# Altium PCB Ad Hoc Radio Node 2005 v3.PCBDOC
Units mm, origin at the board's own origin, x right, y up, seen from the top; angles counter-clockwise.
Board outline 127 x 101.6 mm, 4 copper layers (Top Layer, Internal Plane 1, Internal Plane 2, Bottom Layer); 60 components, 66 nets, 240 pads, 29 vias.
Unrouted connection lines stored in the file: 1.
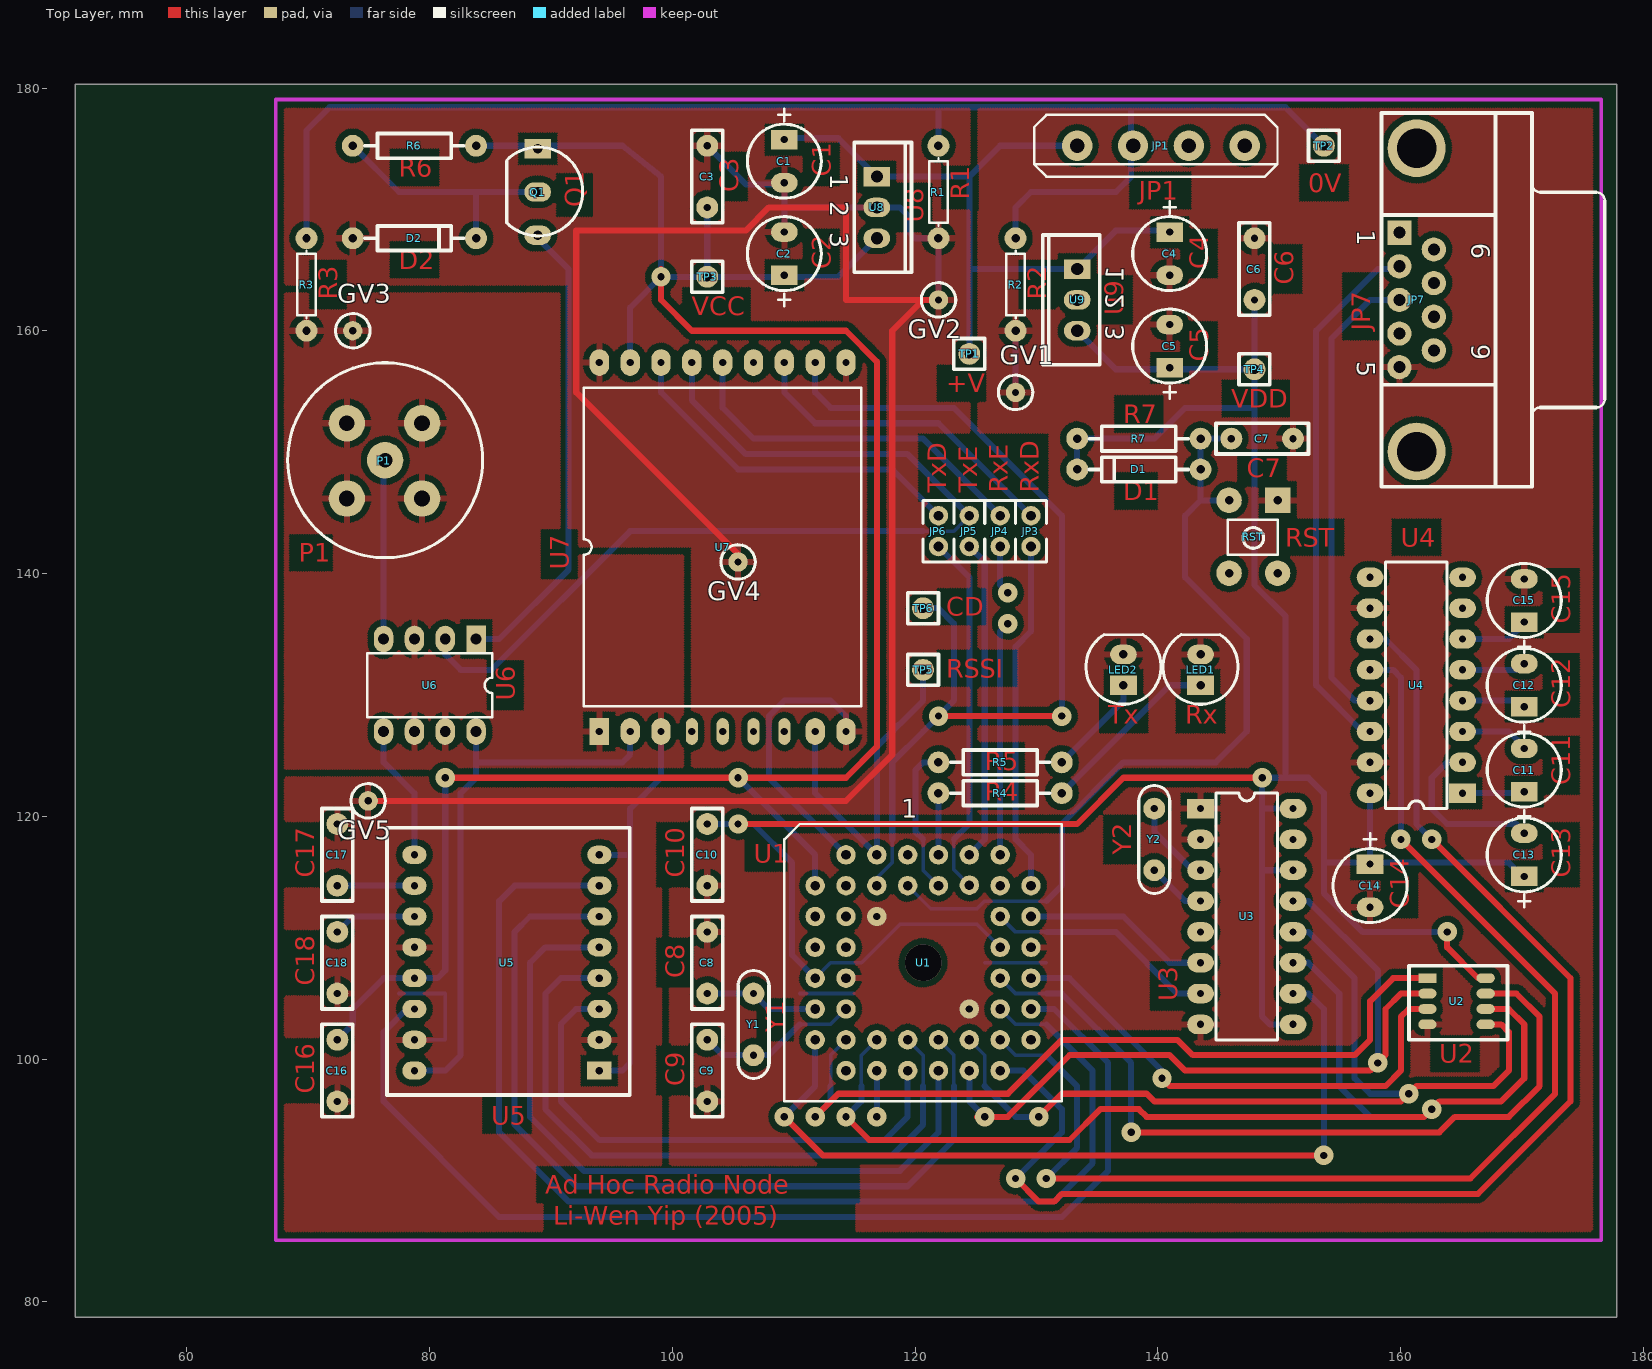
[diagram p0: Top Layer view]
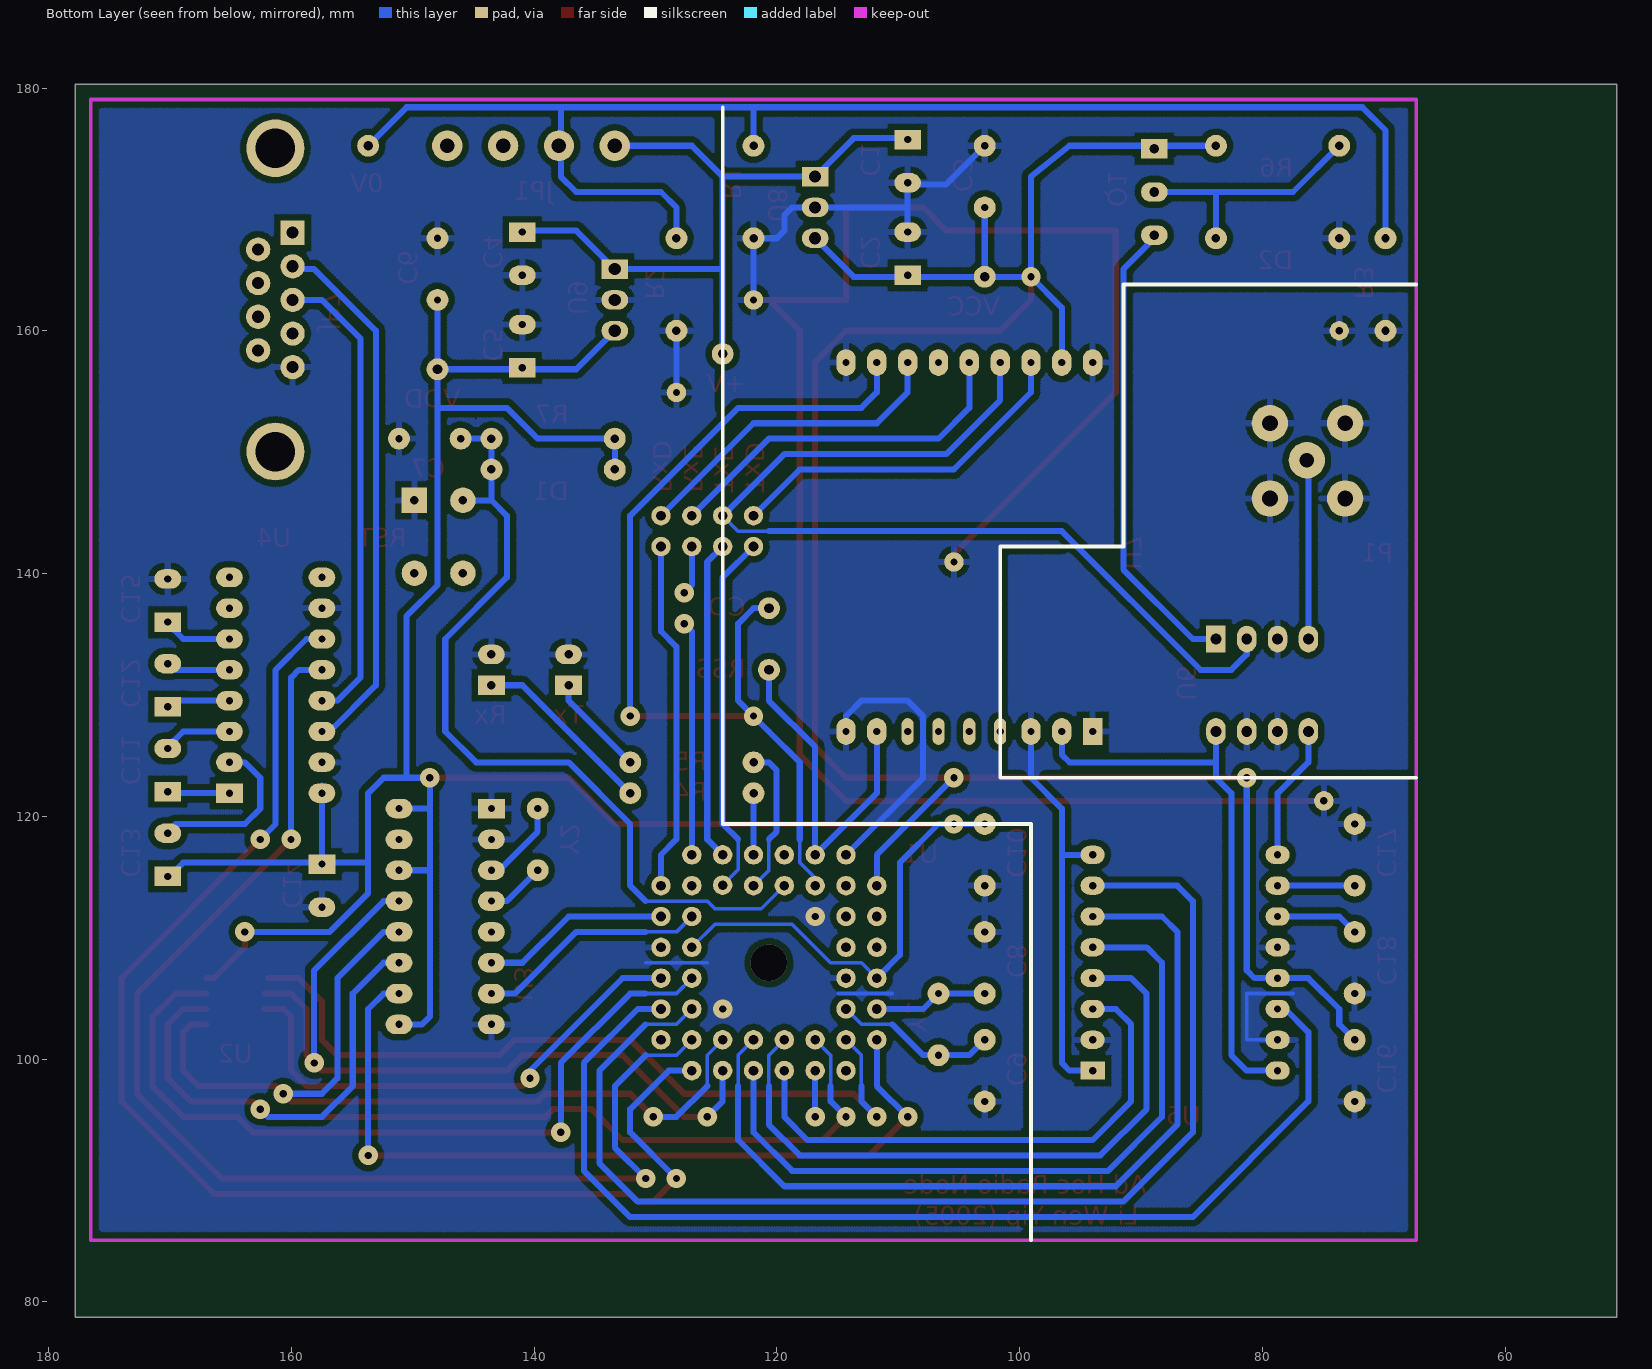
[diagram p1: Bottom Layer view, seen from below]
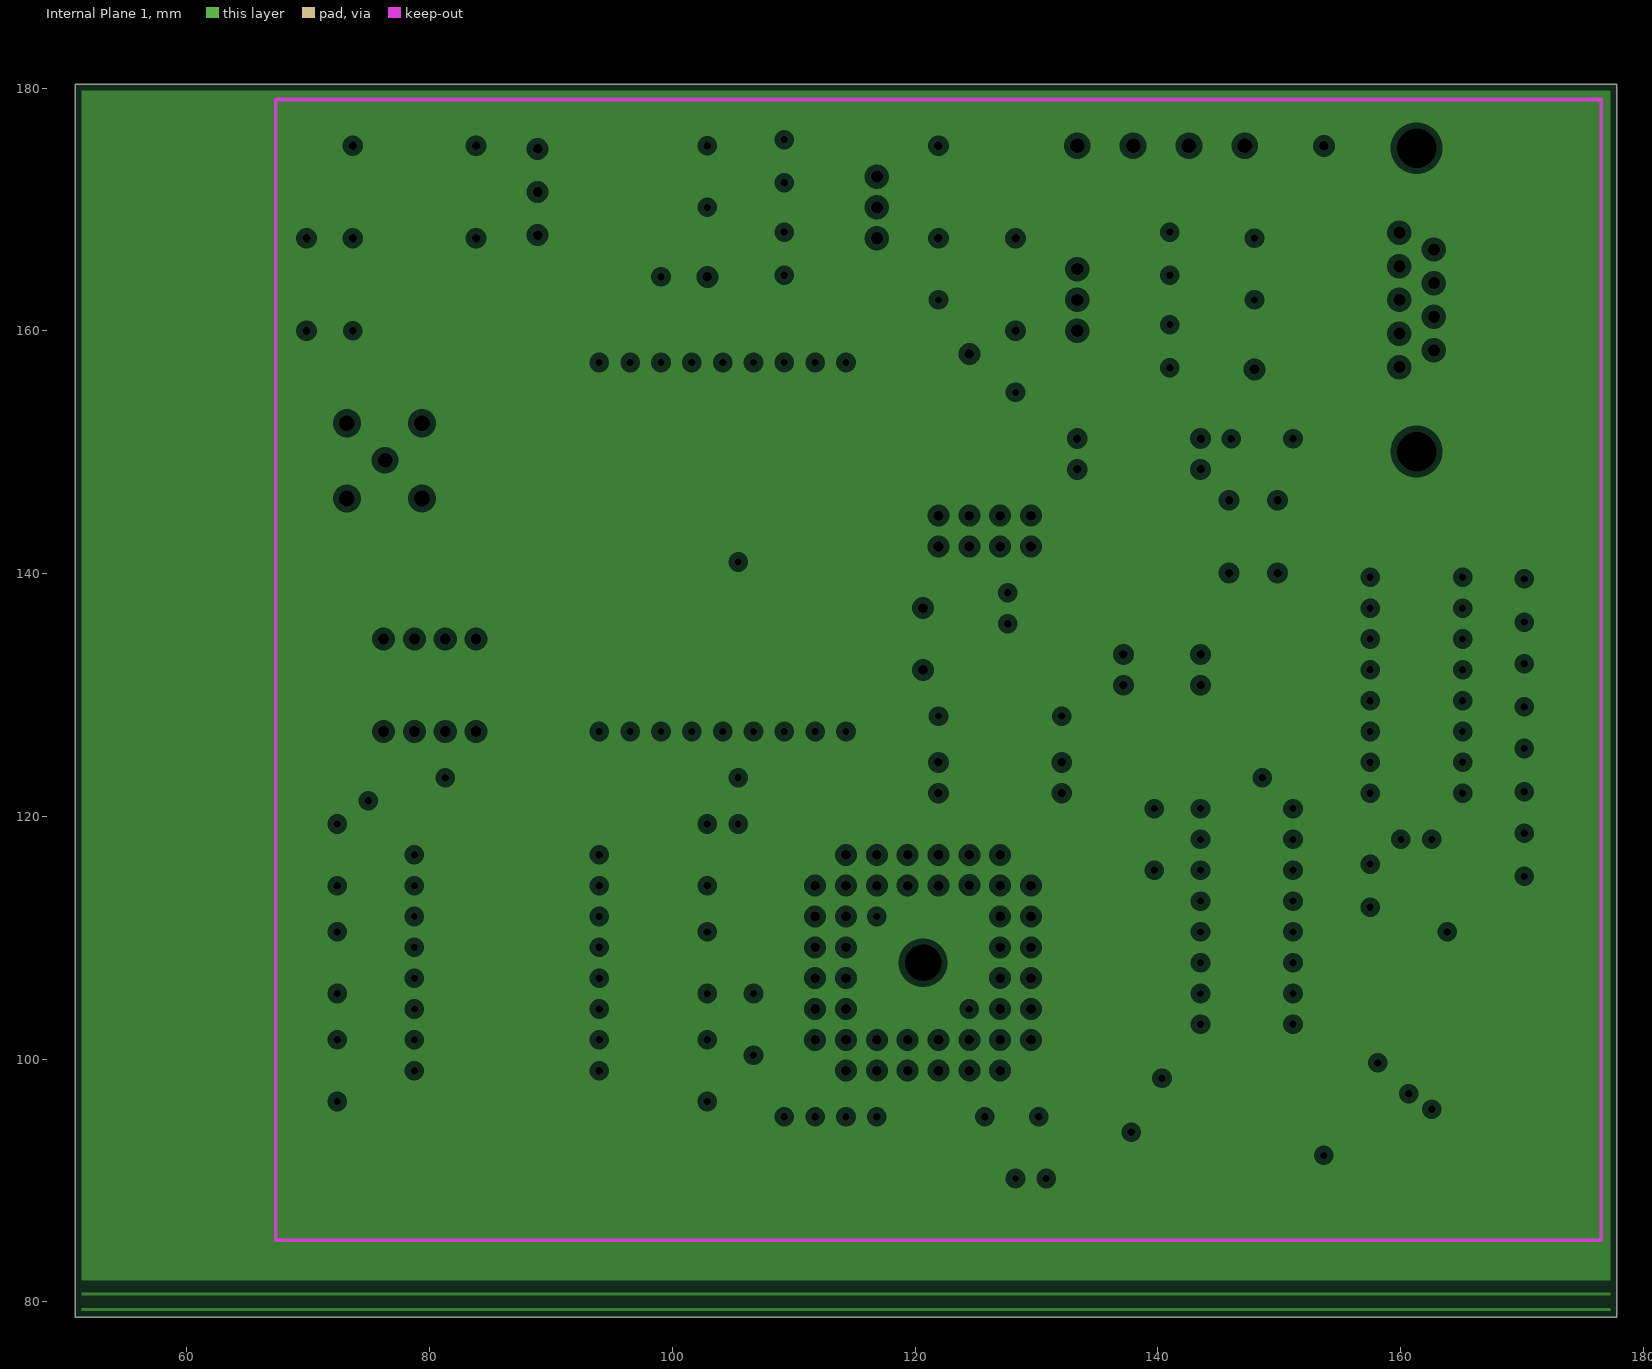
[diagram p2: Internal Plane 1, clearances drawn from the general rule]
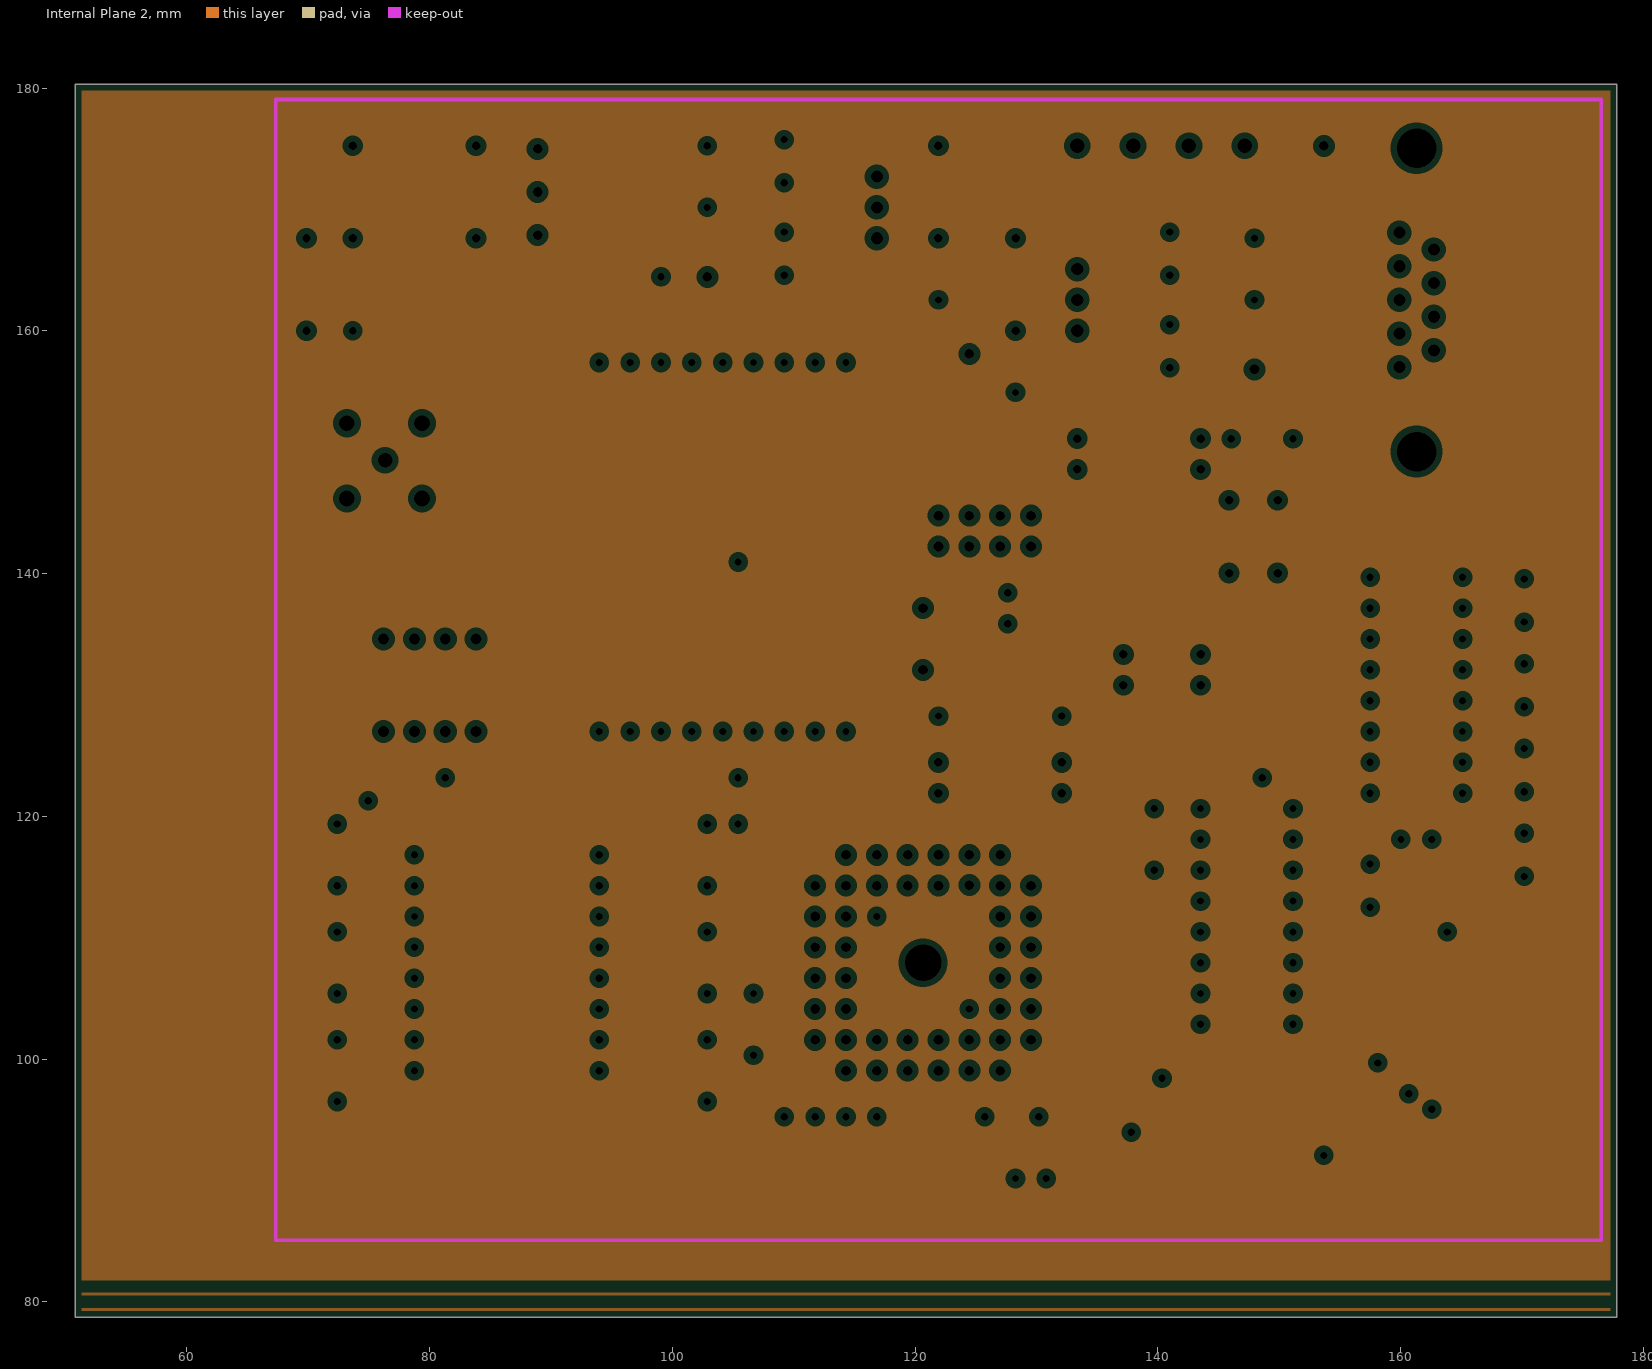
[diagram p3: Internal Plane 2, clearances drawn from the general rule]

## Layer stack, top to bottom
Top Layer: signal copper 0.0356
Dielectric: dielectric 0.32, FR-4, Dk 4.8
Internal Plane 1: plane copper 0.0356
Dielectric: dielectric 0.32, FR-4, Dk 4.8
Internal Plane 2: plane copper 0.0356
Dielectric: dielectric 0.32, FR-4, Dk 4.8
Bottom Layer: signal copper 0.0356

## Board outline
50.8,78.74 177.8,78.74 177.8,180.34 50.8,180.34

## Design rules (kind name [scope] priority, off if disabled: settings)
Clearance [All] p1: gap=0.5
ComponentClearance [All] p1: gap=0.254 collisioncheckmode=0
HoleSize [All] p1: absolutevalues=TRUE maxlimit=5 minlimit=0.6 maxpercent=80.000 minpercent=20.000
PlaneClearance [All] p1: clearance=0.508
PlaneConnect [All] p1: planeconnectstyle=Relief reliefexpansion=0.508 reliefentries=4 reliefconductorwidth=0.254 reliefairgap=0.254
PolygonConnect [All] p1: connectstyle=Relief reliefconductorwidth=0.5 reliefentries=4 polygonreliefangle="90 Angle"
RoomDefinition "Ad Hoc Radio Node 2005 v3" [InComponentClass('Ad Hoc Radio Node 2005 v3')] p1: confinementstyle=ConfineIn formatcopy=TRUE outline 0,0 50.8,0 50.8,25.4 0,25.4
RoutingLayers [All] p1: top layer=Horizontal bottom layer=Vertical
RoutingVias [All] p1: holewidth=0.6 width=1.6 viastyle="Through Hole" minholewidth=0.6 minwidth=1.6 maxholewidth=0.6 maxwidth=1.6
SolderMaskExpansion [All] p1: expansion=0.102
TestPointUsage [All] p1: valid=0 allowmultiple=FALSE
Testpoint [All] p1: side=15 testpointundercomponent=TRUE minsize=1.016 maxsize=2.54 preferedsize=1.524 minholesize=0 maxholesize=1.016 preferedholesize=0.813 testpointgrid=0.025 style=1023 order=-539222988
Width [All] p1: maxlimit=1.27 minlimit=0.3 preferedwidth=0.305 toplayer_prefwidth=0.5 bottomlayer_prefwidth=0.5 minimp=50.000000 maximp=50.000000 favimp=50.000000
13 further rules are at their usual default settings.

## Components (designator, comment, footprint, x,y, rotation, side; value= is the part's Value field where it differs from the comment)
C1 "Cap" "0.1 ELECTRO CAP" 109.22,175.26 r270 top
C2 "Cap" "0.1 ELECTRO CAP" 109.22,165.1 r90 top
C3 "Cap" "0.2 BOX CAP"#1 105.41,175.26 r90 top
C4 "Cap" "0.1 ELECTRO CAP" 140.97,167.64 r270 top
C5 "Cap" "0.1 ELECTRO CAP" 140.97,157.48 r90 top
C6 "Cap" "0.2 BOX CAP"#2 145.415,167.64 r90 top
C7 "0.1uF" "0.2 BOX CAP"#1 151.13,148.59 r0 top
C8 "Cap" "0.2 BOX CAP"#1 100.33,105.41 r270 top
C9 "Cap" "0.2 BOX CAP"#1 105.41,101.6 r90 top
C10 "" "0.2 BOX CAP"#1 100.33,114.3 r270 top
C11 "Cap2" "0.1 ELECTRO CAP" 170.18,122.555 r90 top
C12 "Cap2" "0.1 ELECTRO CAP" 170.18,129.54 r90 top
C13 "Cap2" "0.1 ELECTRO CAP" 170.18,115.57 r90 top
C14 "Cap2" "0.1 ELECTRO CAP" 157.48,115.57 r270 top
C15 "Cap2" "0.1 ELECTRO CAP" 170.18,136.525 r90 top
C16 "" "0.2 BOX CAP"#1 74.93,101.6 r90 top
C17 "" "0.2 BOX CAP"#1 74.93,119.38 r90 top
C18 "" "0.2 BOX CAP"#1 69.85,105.41 r270 top
D1 "1N914" diode-0.4/1.8 140.97,148.59 r180 top (schematic designator D2)
D2 "D Zener" diode-0.4/1.8 76.2,167.64 r0 top
GV1 "GV" GROUNDVIA 128.27,154.94 r0 top
GV2 "GV" GROUNDVIA 121.92,162.56 r0 top
GV3 "GV" GROUNDVIA 73.66,160.02 r0 top
GV4 "GV" GROUNDVIA 105.41,140.97 r0 top (schematic designator GV2)
GV5 "GV" GROUNDVIA 74.93,121.285 r0 top (schematic designator GV2)
JP1 "Header 4" "4 WAY TERMINAL BLOCK" 133.35,175.26 r0 top
JP3 "RxD" JUMPER 129.54,144.78 r270 top (schematic designator JP5)
JP4 "RxE" JUMPER 127,144.78 r270 top (schematic designator JP6)
JP5 "TxE" JUMPER 124.46,144.78 r270 top (schematic designator JP3)
JP6 "TxD" JUMPER 121.92,144.78 r270 top (schematic designator JP4)
JP7 "D Connector 9" DSUB1.385-2H9 170.815,162.56 r270 top
LED1 "Rx" "STD LED" 143.51,130.81 r90 top
LED2 "Tx" "STD LED" 137.16,130.81 r90 top
P1 "PCB BNC CONNECTOR" "PCB BNC Connector" 79.375,152.4 r270 top (schematic designator P2)
Q1 "BC548" BJT 88.9,173.99 r270 top
R1 "" AXIAL-0.3 121.92,171.45 r270 top
R2 "" AXIAL-0.3 128.27,163.83 r270 top
R3 "" AXIAL-0.3 69.85,163.83 r270 top
R4 "" AXIAL-0.4/1.8 124.46,121.92 r0 top
R5 "" AXIAL-0.4/1.8 124.46,124.46 r0 top
R6 "" AXIAL-0.4/1.8 81.28,175.26 r180 top
R7 "Res1" AXIAL-0.4/1.8 140.97,151.13 r180 top
RST "SW-PB" "RESET SWITCH - DUPLICATE" 149.86,146.05 r270 top (schematic designator S1)
TP1 "+V" TESTPOINT 121.92,158.115 r0 top
TP2 "0V" TESTPOINT 151.13,175.26 r0 top
TP3 "VCC" TESTPOINT 102.87,167.005 r270 top
TP4 "VDD" TESTPOINT 147.955,159.385 r270 top
TP5 "RSSI" TESTPOINT 118.11,132.08 r0 top
TP6 "CD" TESTPOINT 118.11,137.16 r0 top
U1 "PIC18C452_PLCC" "PIC18C452_PLCC - DUPLICATE" 111.76,116.84 r0 top
U2 "FRAM" "Ramtron FRAM" 162.205,106.68 r0 top
U3 "DS1306" DIP-16 143.51,120.65 r0 top
U4 "MAX232EPE" DIP-16 165.1,121.92 r180 top
U5 "" DIP16-ADAPTOR 93.98,99.06 r180 top
U6 "ADG918" DIP-8 80.01,130.81 r180 top
U7 "X2010 NBFM Transceiver" X2010 93.98,127 r90 top
U8 "LM340T5.0" SFM-T3/A4.7V 116.84,170.18 r270 top
U9 "LM340T5.0" SFM-T3/A4.7V 133.35,162.56 r270 top
Y1 "XTAL" XTAL 106.68,105.41 r270 top
Y2 "XTAL" XTAL 139.7,120.65 r270 top

## Footprints (in the part's own frame and the unit in brackets; to place one, negate y for a bottom-side part, rotate by r counter-clockwise, add the part's x,y. Pads: shape width x height; smd on the part's side, far side on the other; paste and mask are expansions set on the pad)
"0.1 ELECTRO CAP" [mm] "Electrolytic Cap"
  rect 1.6x2.2 hole 0.6: 1(-0.508,0)
  oval 1.6x2.2 hole 0.6: 2(3.048,0)
  silkscreen extent -3.05,-3.04 4.32,3.05
"0.2 BOX CAP"#1 [mm]
  round 1.8 hole 0.6: 1(-5.08,2.54) 2(0,2.54)
  silkscreen extent -6.35,1.27 1.27,3.81
"0.2 BOX CAP"#2 [mm]
  round 1.8 hole 0.6: 1(-5.08,-2.54) 2(0,-2.54)
  silkscreen extent -6.35,-3.81 1.27,-1.27
"4 WAY TERMINAL BLOCK" [mm]
  round 2.5 hole 1.2: 1(0,0) 2(4.6,0) 3(9.2,0) 4(13.8,0)
  silkscreen extent -3.56,-2.54 16.5,2.54
AXIAL-0.3 [mm]
  round 1.8 hole 0.7: 1(-3.81,0) 2(3.81,0)
  silkscreen extent -2.77,-0.76 2.77,0.76
AXIAL-0.4/1.8 [mm]
  round 1.8 hole 0.7: 1(-2.54,0) 2(7.62,0)
  silkscreen extent -1.52,-1.02 6.6,1.02
BJT [mm]
  rect 1.6x2.2 hole 0.8: 1(-1.016,0)
  oval 1.6x2.2 hole 0.8: 2(2.54,0) 3(6.096,0)
  silkscreen extent -1.16,-2.54 6.15,3.71
diode-0.4/1.8 [mm]
  round 1.8 hole 0.7: 1(-2.54,0) 2(7.62,0)
  silkscreen extent -1.52,-1.02 6.6,1.02
DIP16-ADAPTOR [mm]
  rect 2x1.5 hole 0.6: 1(0,0)
  oval 2x1.5 hole 0.6: 2(0,-2.54) 3(0,-5.08) 4(0,-7.62) 5(0,-10.16) 6(0,-12.7) 7(0,-15.24) 8(0,-17.78) 9(15.24,-17.78) 10(15.24,-15.24) 11(15.24,-12.7) 12(15.24,-10.16) 13(15.24,-7.62) 14(15.24,-5.08) 15(15.24,-2.54) 16(15.24,0)
  silkscreen extent -2.5,-20 17.5,2
DIP-8 [mm]
  rect 1.6x2.2 hole 0.9: 1(-3.81,-3.81)
  oval 1.6x2.2 hole 0.9: 2(-1.27,-3.81) 3(1.27,-3.81) 4(3.81,-3.81) 5(3.81,3.81) 6(1.27,3.81) 7(-1.27,3.81) 8(-3.81,3.81)
  silkscreen extent -5.15,-2.65 5.15,2.65
DIP-16 [mm]
  rect 2.2x1.6 hole 0.6: 1(0,0)
  oval 2.2x1.6 hole 0.6: 2(0,-2.54) 3(0,-5.08) 4(0,-7.62) 5(0,-10.16) 6(0,-12.7) 7(0,-15.24) 8(0,-17.78) 9(7.62,-17.78) 10(7.62,-15.24) 11(7.62,-12.7) 12(7.62,-10.16) 13(7.62,-7.62) 14(7.62,-5.08) 15(7.62,-2.54) 16(7.62,0)
  silkscreen extent 1.27,-19.05 6.35,1.27
DSUB1.385-2H9 [mm]
  rect 2x2 hole 1: 1(-5.54,-10.92)
  round 2 hole 1: 2(-2.77,-10.92) 3(0,-10.92) 4(2.77,-10.92) 5(5.54,-10.92) 6(-4.155,-8.08) 7(-1.385,-8.08) 8(1.385,-8.08) 9(4.155,-8.08)
  round 4.76 hole 3.26: 10(-12.495,-9.5) 11(12.495,-9.5)
  silkscreen extent -15.4,-12.4 15.4,6
GROUNDVIA [mm]
  round 1.6 hole 0.6: 1(0,0)
  silkscreen extent -1.42,-1.42 1.42,1.42
JUMPER [mm]
  round 1.6 hole 0.8: 1(0,0) 2(2.54,0)
  silkscreen extent -1.27,-1.27 3.81,1.27
"PCB BNC Connector" [mm]
  round 3 hole 1.2: 1(3.048,-3.048)
  round 3 hole 1.3: 2(0,0) 2(0,-6.2) 2(6.2,0) 2(6.2,-6.2)
  silkscreen extent -4.98,-11.08 11.08,4.98
"PIC18C452_PLCC - DUPLICATE" [mm]
  round 1.6 hole 0.8: 1(7.62,0) 2(7.62,-2.54) 3(5.08,0) 4(5.08,-2.54) 5(2.54,0) 6(0,-2.54) 7(2.54,-2.54) 8(0,-5.08) 9(2.54,-5.08) 10(0,-7.62) 11(2.54,-7.62) 12(0,-10.16) 13(2.54,-10.16) 14(0,-12.7) 15(2.54,-12.7) 16(0,-15.24) 17(2.54,-17.78) 18(2.54,-15.24) 19(5.08,-17.78) 20(5.08,-15.24) 21(7.62,-17.78) 22(7.62,-15.24) 23(10.16,-17.78) 24(10.16,-15.24) 25(12.7,-17.78) 26(12.7,-15.24) 27(15.24,-17.78) 28(17.78,-15.24) 29(15.24,-15.24) 30(17.78,-12.7) 31(15.24,-12.7) 32(17.78,-10.16) 33(15.24,-10.16) 34(17.78,-7.62) 35(15.24,-7.62) 36(17.78,-5.08) 37(15.24,-5.08) 38(17.78,-2.54) 39(15.24,0) 40(15.24,-2.54) 41(12.7,0) 42(12.7,-2.5) 43(10.16,0) 44(10.16,-2.54)
  silkscreen extent -2.54,-20.32 20.32,2.54
"Ramtron FRAM" [mm]
  rect 1.5x0.8 smd: 1(0,0)
  oval 1.5x0.8 smd: 2(0,-1.27) 3(0,-2.54) 4(0,-3.81) 5(4.8,-3.81) 6(4.8,-2.54) 7(4.8,-1.27) 8(4.8,0)
  silkscreen extent -1.52,-5.08 6.6,1.02
"RESET SWITCH - DUPLICATE" [mm]
  rect 2.1x2.1 hole 0.7: 1(0,0)
  round 2.1 hole 0.7: 2(0,-4) ""(6,0) ""(6,-4)
  silkscreen extent 1.6,-4.1 4.5,0
SFM-T3/A4.7V [mm]
  rect 1.6x2.2 hole 1: 1(-2.54,0)
  oval 1.6x2.2 hole 1: 2(0,0) 3(2.54,0)
  silkscreen extent -5.35,-1.85 5.35,2.85
"STD LED" [mm]
  rect 1.6x2.2 hole 0.7: 1(0,0)
  oval 1.6x2.2 hole 0.7: 2(2.54,0)
  silkscreen extent -1.56,-3.09 4.17,3.09
TESTPOINT [mm] "Test Point"
  round 1.8 hole 0.8: 1(2.54,0)
  silkscreen extent 1.27,-1.27 3.81,1.27
X2010 [mm]
  rect 2.2x1.6 hole 0.6: 1(0,0)
  oval 2.2x1.6 hole 0.6: 2(0,-2.54) 3(0,-5.08) 8(0,-17.78) 9(0,-20.32) 10(30.4,-20.32) 11(30.4,-17.78) 12(30.4,-15.24) 13(30.4,-12.7) 14(30.4,-10.16) 15(30.4,-7.62) 16(30.4,-5.08) 17(30.4,-2.54) 18(30.4,0)
  oval 2.2x1 hole 0.6: 4(0,-7.62) 5(0,-10.16) 6(0,-12.7) 7(0,-15.24)
  silkscreen extent 2.08,-21.59 28.32,1.27
XTAL [mm] "Crystal"
  round 1.8 hole 0.6: 1(0,0) 2(5.08,0)
  silkscreen extent -1.9,-1.27 6.98,1.27

## Part data
C1 C2 C3 C4 C5 C6 C8 C9 C11 C12 C13 C15: "Capacitor"
C7: library part CAP, "Capacitor"
C10 C16 C17 C18: library part Cap, "Capacitor"
C14: library part "Cap Pol1", "Polarized Capacitor (Radial)"
D1: library part Diode, "Default Diode"
D2: "Zener Diode"
JP1: "Header, 4-Pin"
JP3 JP4 JP5 JP6: library part JUMPER
JP7: "Receptacle Assembly, 9 Position, Right Angle"
LED1 LED2: library part LED2, "Typical RED, GREEN, YELLOW, AMBER GaAs LED"
P1: library part BNC, "BNC Elbow Connector"
Q1: library part NPN, "NPN Bipolar Transistor"
R1 R2 R3 R4 R5 R6: library part Res1, "Resistor"
R7: "Resistor"
RST: "Switch"
TP1 TP2 TP3 TP4 TP5 TP6: library part TESTPOINT, "Test Point"
U4: "+5V Powered RS-232 Driver/Receiver"
U5: library part AD8369_DIGITAL_CONT_PWR_AMP
U6: library part "T7 NBFM TRANSMITTER"
U7: library part "R7 NBFM RECEIVER"
U8 U9: "Series 3-Terminal Positive Regulator"
Y1 Y2: "Crystal Oscillator"

## Via types
v1: diameter 1.6, hole 0.6, Top Layer to Bottom Layer, 28 vias
v2: diameter 3, hole 3, Top Layer to Bottom Layer, 1 vias

## Nets (pads, with @x,y where several pads share a name; then routed paths per layer and width w, separated by ;. In a path a pad name is that pad's centre, name@x,y a point inside that pad or via, vN(x,y) a via of type N, cw(c..) or ccw(c..) an arc to the next point about the centre after c; other vN are vias at no path point)
0V: JP1.2 R1.1 R2.1 R3.1 TP2.1 | length 116.8
  Bottom Layer w0.5: R3.1 69.85,176.53 71.755,178.435 150.495,178.435 TP2.1 ; R1.1 121.92,178.435 ; R2.1 128.27,170.18 129.54,171.45 136.525,171.45 137.795,172.72 137.795,178.435
2.6V: Q1.3 U6.1 | length 38.3
  Bottom Layer w0.5: U6.1 85.725,134.62 91.44,140.335 91.44,165.1 Q1.3@88.9,167.64
3.3V: D2.2 Q1.2 R6.2 | length 20.6
  Bottom Layer w0.5: R6.2 77.47,171.45 Q1.2 ; D2.2 83.82,171.45
ANTENNA: P1.1 U6.4 | length 14.6
  Bottom Layer w0.5: U6.4 P1.1@76.2,149.225
B0: U1.21 U5.3 | length 44.5
  Bottom Layer w0.5: U5.3 92.075,104.14 90.805,102.87 90.805,96.52 93.98,93.345 117.475,93.345 119.38,95.25 U1.21
B1: U1.22 U5.4 | length 55.8
  Bottom Layer w0.3: U1.22 120.65,100.33 120.65,97.79
  Bottom Layer w0.5: U5.4 90.805,106.68 89.535,105.41 89.535,95.885 93.345,92.075 118.11,92.075 120.65,94.615 120.65,97.79
B2: U1.23 U5.5 | length 60.8
  Bottom Layer w0.5: U5.5 89.535,109.22 88.265,107.95 88.265,95.25 92.71,90.805 118.745,90.805 121.92,93.98 U1.23
B3: U1.24 U5.6 | length 72
  Bottom Layer w0.3: U1.24 123.19,100.33 123.19,97.79
  Bottom Layer w0.5: U5.6 88.265,111.76 86.995,110.49 86.995,94.615 92.075,89.535 119.38,89.535 123.19,93.345 123.19,97.79
C1+: C11.1 U4.1 | length 5.1
  Bottom Layer w0.5: U4.1 C11.1@170.18,121.92
C1-: C11.2 U4.3 | length 5.6
  Bottom Layer w0.5: U4.3 168.91,127 C11.2@170.18,125.73
C2+: C12.1 U4.4 | length 5.3
  Bottom Layer w0.5: U4.4 169.545,129.54 C12.1@170.18,128.905
C2-: C12.2 U4.5 | length 5.3
  Bottom Layer w0.5: U4.5 169.545,132.08 C12.2@170.18,132.715
CD: TP6.1 U1.4 U7.11 | length 80.9
  Top Layer w0.5: v1(121.92,128.27) v1(132.08,128.27)
  Bottom Layer w0.3: U1.4 116.84,114.935 118.11,116.205 118.11,118.11
  Bottom Layer w0.5: U7.11 111.76,154.94 113.03,153.67 123.19,153.67 132.08,144.78 v1(132.08,128.27) ; 118.11,118.11 118.11,124.46 120.65,127 v1(121.92,128.27) 123.19,129.54 123.19,135.89 121.92,137.16 TP6.1
DENB: U1.31 U5.7 | length 98.4
  Bottom Layer w0.3: U1.31 128.27,102.87 130.81,102.87
  Bottom Layer w0.5: U5.7@94.615,114.3 86.995,114.3 85.725,113.03 85.725,93.98 91.44,88.265 131.445,88.265 134.62,91.44 134.62,99.06 130.81,102.87
FRAM_CS: U1.18 U2.1 | length 65.2
  Top Layer w0.5: v1(111.76,95.25) 113.665,97.155 127.635,97.155 132.08,101.6 141.605,101.6 142.875,100.33 156.21,100.33 157.48,101.6 157.48,104.775 159.385,106.68 U2.1@161.925,106.68
  Bottom Layer w0.3: 113.03,97.79 113.03,100.33 U1.18
  Bottom Layer w0.5: v1(111.76,95.25) 113.03,96.52 113.03,97.79
GND: C4.2 C5.2 C6.2 C7.2 C8.1 C9.1 C10.2 C14.2 C15.2 GV1.1 JP7.5 LED1.2 LED2.2 R2.2 RST.1 U1.13 U1.34 U2.4 U3.1 U3.2 U3.8 U4.10 U4.15 U9.2 | length 14.6
  Bottom Layer w0.3: 110.49,105.41 114.935,105.41 ; 125.73,107.95 130.81,107.95
  Bottom Layer w0.5: GV1.1 R2.2
  other v1: 124.46,104.14 116.84,111.76
HOLD: U1.33 U2.7 | length 65.6
  Top Layer w0.5: v1(137.795,93.98) 163.195,93.98 164.465,95.25 168.91,95.25 171.45,97.79 171.45,103.505 169.545,105.41 U2.7
  Bottom Layer w0.3: U1.33 128.27,105.41 130.81,105.41
  Bottom Layer w0.5: 130.81,105.41 132.08,105.41 137.795,99.695 v1(137.795,93.98)
INT1: U1.37 U3.7 | length 19.1
  Bottom Layer w0.3: U1.37 128.27,110.49 130.81,110.49
  Bottom Layer w0.5: 130.81,110.49 136.525,110.49 141.605,105.41 U3.7
INTO: U1.36 U3.6 | length 15.5
  Bottom Layer w0.5: U1.36 137.16,111.76 140.97,107.95 U3.6
MCLR: C7.1 D1.1 R7.1 RST.2 U1.2 | length 70.2
  Bottom Layer w0.3: U1.2 121.285,112.395 125.095,112.395 125.73,113.03 130.81,113.03
  Bottom Layer w0.5: 130.81,113.03 132.08,114.3 132.08,119.38 137.16,124.46 144.78,124.46 147.32,127 147.32,134.62 142.24,139.7 142.24,144.78 143.51,146.05 ; C7.1 R7.1 143.51,146.05 ; RST.2@146.685,146.05 143.51,146.05
MISO: U1.25 U2.2 U3.13 | length 65.9
  Top Layer w0.5: v1@125.095,95.25 v1(125.73,95.25) 127.635,95.25 132.715,100.33 140.97,100.33 142.24,99.06 157.48,99.06 v1(158.115,99.695) 158.75,100.33 158.75,104.14 160.02,105.41 U2.2
  Bottom Layer w0.5: U1.25 124.46,96.52 v1(125.73,95.25) ; U3.13 152.4,113.03 158.115,107.315 v1(158.115,99.695)
MOSI: U1.26 U2.5 U3.12 | length 75.9
  Top Layer w0.5: v1(130.175,95.25) 132.08,97.155 139.065,97.155 139.7,96.52 160.02,96.52 v1(160.655,97.155) 161.29,97.79 163.195,97.79 167.64,97.79 168.91,99.06 168.91,102.235 168.275,102.87 U2.5
  Bottom Layer w0.3: U1.26 125.73,100.33 125.73,97.79
  Bottom Layer w0.5: 125.73,97.79 128.27,95.25 v1(130.175,95.25) ; U3.12 152.4,110.49 156.21,106.68 156.21,98.425 157.48,97.155 v1(160.655,97.155)
NetC13_2: C13.2 U4.2 | length 14
  Bottom Layer w0.5: U4.2 163.83,124.46 162.56,123.19 162.56,120.65 163.83,119.38 169.545,119.38 C13.2@170.18,118.745
NetC15_1: C15.1 U4.6 | length 5.6
  Bottom Layer w0.5: U4.6 168.91,134.62 C15.1@170.18,135.89
NetC17_1: C17.1 U5.10 | length 6.3
  Bottom Layer w0.5: C17.1 U5.10
NetC18_1: C18.1 U5.11 | length 6.9
  Bottom Layer w0.5: C18.1 73.66,111.76 U5.11
NetLED1_1: LED1.1 R4.2 | length 15.1
  Bottom Layer w0.5: R4.2 140.97,130.81 LED1.1
NetLED2_1: LED2.1 R5.2 | length 8.5
  Bottom Layer w0.5: R5.2 137.16,129.54 LED2.1
NetU3_3: U3.3 Y2.1 | length 7
  Bottom Layer w0.5: Y2.1 139.7,118.745 142.875,115.57 U3.3
NetU3_4: U3.4 Y2.2 | length 4.9
  Bottom Layer w0.5: Y2.2 142.24,113.03 U3.4
NetU7_4: U7.4
OSC1: C8.2 U1.14 Y1.1 | length 9.4
  Bottom Layer w0.5: C8.2 104.14,105.41 Y1.1 107.95,104.14 U1.14
OSC2: C9.2 U1.15 Y1.2 | length 13.5
  Bottom Layer w0.3: 110.49,102.87 113.03,102.87 U1.15
  Bottom Layer w0.5: C9.2 104.14,100.33 Y1.2 107.95,100.33 110.49,102.87
PWUP: U1.30 U5.14 | length 91.3
  Bottom Layer w0.5: U5.14 78.105,104.14 76.2,102.235 76.2,96.52 85.725,86.995 132.08,86.995 135.89,90.805 135.89,99.695 131.445,104.14 U1.30
R1IN: JP7.3 U4.13 | length 38.9
  Bottom Layer w0.5: U4.13 156.21,129.54 154.305,131.445 154.305,159.385 157.48,162.56 JP7.3@160.02,162.56
R1OUT: U1.29 U4.12 | length 103.8
  Top Layer w0.5: v1(130.81,90.17) 165.735,90.17 172.72,97.155 172.72,105.41 v1(160.02,118.11)
  Bottom Layer w0.3: U1.29 128.27,100.33 130.81,100.33
  Bottom Layer w0.5: v1(130.81,90.17) 133.35,92.71 133.35,97.79 130.81,100.33 ; U4.12 159.385,132.08 160.02,131.445 v1(160.02,118.11)
RFGND: GV3.1 P1.2 R3.2 U5.1 U5.8 U6.3 U6.6 U6.7 U7.1 U7.3 | length 33.7
  Bottom Layer w0.5: U5.1 95.885,99.06 96.52,99.695 96.52,120.65 99.06,123.19 U7.3 ; U5.8 96.52,116.84
RSSI: TP5.1 U1.3 U7.8 | length 29.1
  Bottom Layer w0.5: U7.8 111.76,121.92 U1.3 116.84,125.73 120.65,129.54 TP5.1
RTC_CS: U1.16 U3.10 | length 68.3
  Top Layer w0.5: v1(109.22,95.25) 112.395,92.075 v1(153.67,92.075)
  Bottom Layer w0.5: v1(109.22,95.25) 111.76,97.79 U1.16 ; U3.10 152.4,105.41 153.67,104.14 153.67,101.6 v1(153.67,92.075)
RXD: JP3.1 U7.12 | length 27
  Bottom Layer w0.5: U7.12 109.22,154.94 111.76,152.4 121.92,152.4 JP3.1
RXD_2: JP3.2 U1.38 | length 29
  Bottom Layer w0.5: U1.38 129.54,116.84 128.27,118.11 128.27,133.985 129.54,135.255 JP3.2
RXEN: JP6.1 U7.16 | length 29.5
  Bottom Layer w0.5: U7.16 99.06,156.845 99.06,154.94 105.41,148.59 118.11,148.59 JP6.1
RXEN_2: JP6.2 U1.42 | length 30
  Bottom Layer w0.3: 123.19,118.11 123.19,115.61 U1.42
  Bottom Layer w0.5: JP6.2 124.46,139.7 124.46,119.38 123.19,118.11
RXLED: R4.1 U1.43 | length 5.1
  Bottom Layer w0.5: U1.43 R4.1
SCLK: U1.20 U2.6 U3.11 | length 96.3
  Top Layer w0.5: v1(114.3,95.25) 116.205,93.345 132.715,93.345 135.255,95.885 138.43,95.885 139.065,95.25 161.925,95.25 v1(162.56,95.885) 163.195,96.52 168.275,96.52 170.18,98.425 170.18,102.87 168.91,104.14 U2.6
  Bottom Layer w0.3: 115.57,97.79 115.57,100.33 U1.20
  Bottom Layer w0.5: v1(114.3,95.25) 115.57,96.52 115.57,97.79 ; U3.11 152.4,107.95 154.94,105.41 154.94,97.79 157.48,95.25 161.925,95.25 v1(162.56,95.885)
SGND: C1.2 C2.2 C3.2 C16.1 C17.2 C18.2 D2.1 GV2.1 GV4.1 GV5.1 R1.2 U1.5 U5.2 U5.12 U5.15 U7.9 U7.10 U7.18 U8.2 | length 218.3
  Top Layer w0.5: GV5.1 114.3,121.285 118.11,125.095 118.11,160.02 120.65,162.56 ; GV4.1 105.41,141.605 92.075,154.94 92.075,168.275 106.045,168.275 107.95,170.18 114.3,170.18 114.3,162.56 GV2.1
  Bottom Layer w0.3: 77.47,105.41 81.28,105.41 81.28,101.6 U5.15
  Bottom Layer w0.5: C3.2 106.045,172.085 109.22,172.085 109.22,170.18 ; C2.2@109.22,168.275 109.22,170.18 ; U1.5 107.95,123.19 107.95,128.27 109.22,129.54 113.03,129.54 114.3,128.27 U7.9 ; GV2.1 R1.2 120.015,167.64 119.38,168.275 119.38,169.545 118.745,170.18 U8.2 109.22,170.18
SUPPLY: C1.1 C4.1 JP1.1 TP1.1 U8.1 U9.1 | length 58.9
  Bottom Layer w0.5: C1.1@109.22,175.895 113.665,175.895 U8.1 124.46,172.72 ; TP1.1 124.46,165.1 ; JP1.1 127,175.26 124.46,172.72 ; C4.1@140.97,168.275 136.525,168.275 U9.1 127,165.1 124.46,165.1 ; 124.46,165.1 124.46,172.72
T1IN: U1.27 U4.11 | length 109.3
  Top Layer w0.5: v1(128.27,90.17) 130.175,88.265 131.445,88.265 132.08,88.9 166.37,88.9 173.99,96.52 173.99,106.68 v1(162.56,118.11)
  Bottom Layer w0.5: U1.27 128.905,99.06 132.08,95.885 132.08,93.98 v1(128.27,90.17) ; U4.11 158.75,134.62 161.29,132.08 161.29,119.38 v1(162.56,118.11)
T1OUT: JP7.2 U4.14 | length 44.3
  Bottom Layer w0.5: U4.14 156.845,127 153.035,130.81 153.035,160.02 158.115,165.1 JP7.2@160.02,165.1
TXD: JP4.1 U7.14 | length 30.3
  Bottom Layer w0.5: U7.14 104.14,153.67 106.68,151.13 120.65,151.13 JP4.1
TXD_2: JP4.2 U1.39 | length 23.4
  Bottom Layer w0.5: U1.39 127,135.255 v1(127.635,135.89) ; JP4.2 127,139.065 v1(127.635,138.43)
TXEN: JP5.1 U6.2 U7.15 | length 80.1
  Bottom Layer w0.3: 120.65,143.51 123.19,143.51 JP5.1
  Bottom Layer w0.5: U6.2 81.28,133.35 82.55,132.08 85.09,132.08 96.52,143.51 120.65,143.51 ; U7.15 101.6,156.845 101.6,154.305 106.045,149.86 119.38,149.86 JP5.1
TXEN_2: JP5.2 U1.41 | length 26.5
  Bottom Layer w0.5: U1.41 125.73,118.11 125.73,140.97 JP5.2
TXLED: R5.1 U1.44 | length 12.5
  Bottom Layer w0.3: 120.65,118.11 120.65,115.57 U1.44
  Bottom Layer w0.5: 120.65,118.11 120.015,118.745 120.015,123.825 120.65,124.46 R5.1
TXRFOUT: 
TXRFOUT: 
TXRFOUT: 
TXRFOUT: 
TXRFOUT: 
TXRFOUT: 
VCC: C2.1 C3.1 C16.2 Q1.1 R6.1 TP3.1 U1.6 U5.13 U7.17 U8.3 | length 188.1
  Top Layer w0.5: v1(81.28,123.19) 114.3,123.19 116.84,125.73 116.84,157.48 114.3,160.02 101.6,160.02 99.06,162.56 v1(99.06,164.465) v1@99.06,165.1
  Bottom Layer w0.5: C16.2 73.66,102.87 73.66,104.14 76.2,106.68 U5.13 80.645,106.68 81.28,107.315 v1(81.28,123.19) ; R6.1@83.185,175.26 95.885,175.26 99.06,172.72 v1(99.06,164.465) ; U7.17@96.52,157.48 96.52,161.925 v1(99.06,164.465) ; TP3.1 C3.1 ; v1(105.41,123.19) 111.76,116.84 U1.6 ; U8.3 113.665,164.465 108.585,164.465 v1(99.06,164.465)
VDD: C5.1 C6.1 C10.1 C13.1 C14.1 D1.2 R7.2 TP4.1 U1.12 U1.35 U2.8 U3.9 U3.14 U3.16 U4.16 U9.3 | length 237.6
  Top Layer w0.5: v1(105.41,119.38) 133.35,119.38 137.16,123.19 v1(148.59,123.19) ; v1(163.83,110.49) 163.83,109.22 166.37,106.68 U2.8
  Bottom Layer w0.3: U1.12 113.03,107.95 115.57,107.95 116.205,108.585 118.745,111.125 125.095,111.125 U1.35
  Bottom Layer w0.5: C10.1 v1(105.41,119.38) 106.68,119.38 109.855,116.205 109.855,108.585 U1.12 ; D1.2 R7.2 139.7,151.13 142.24,153.67 147.955,153.67 ; U9.3 136.525,156.845 140.97,156.845 TP4.1 ; C6.1 147.955,161.29 TP4.1 ; 148.59,115.57 U3.14 ; 148.59,120.65 U3.16 ; 150.495,123.19 150.495,136.525 147.955,139.065 TP4.1 ; U3.9 149.225,102.87 148.59,103.505 v1(148.59,123.19) 152.4,123.19 153.67,121.92 153.67,113.665 156.845,110.49 v1(163.83,110.49) ; 153.67,116.205 C14.1@157.48,116.205 ; U4.16@157.48,122.555 C14.1@157.48,116.205 ; C13.1@170.18,114.935 168.91,116.205 C14.1@157.48,116.205
VGA_OUT: U5.9 U6.5 | length 11.2
  Bottom Layer w0.5: U6.5 76.2,124.46 78.74,121.92 U5.9
VREFH: 
WP: U1.32 U2.3 | length 42
  Top Layer w0.5: v1(140.335,98.425) 140.97,97.79 158.75,97.79 160.02,99.06 160.02,103.505 160.655,104.14 U2.3
  Bottom Layer w0.5: U1.32 132.715,106.68 140.335,99.06 v1(140.335,98.425)
X2010_IN: U5.16 U6.8 U7.2 | length 46.4
  Bottom Layer w0.5: U5.16 81.28,99.06 82.55,100.33 82.55,121.92 83.82,123.19 U6.8 ; 83.82,124.46 84.455,124.46 95.885,124.46 96.52,125.095 U7.2
pads on no net: JP1.3 JP1.4 JP7.1 JP7.4 JP7.6 JP7.7 JP7.8 JP7.9 JP7.10 JP7.11 RST. U1.1 U1.7 U1.8 U1.9 U1.10 U1.11 U1.17 U1.19 U1.28 U1.40 U3.5 U3.15 U4.7 U4.8 U4.9 U7.5 U7.6 U7.7 U7.13
copper on no net: | length 3.8
  Bottom Layer w0.5: v1(116.84,95.25) 116.84,99.06
  other v2: 120.65,107.95

## Polygon pours and split planes (outlines as drawn)
GND on Top Layer (hatched 90Degree grid 0.2 track 0.25, remove dead copper): 124.46,179.07 176.53,179.07 176.53,85.09 99.06,85.09 99.06,119.38 124.46,119.38
RFGND on Top Layer (hatched 90Degree grid 0.2 track 0.25, remove dead copper): 67.31,163.83 91.44,163.83 91.44,142.24 101.6,142.24 101.6,123.19 67.31,123.19
SGND on Top Layer (hatched 90Degree grid 0.2 track 0.25, remove dead copper): 67.31,179.07 124.46,179.07 124.46,119.38 99.06,119.38 99.06,85.09 67.31,85.09 67.31,123.19 101.6,123.19 101.6,142.24 91.44,142.24 91.44,163.83 67.31,163.83
GND on Bottom Layer (hatched 90Degree grid 0.2 track 0.25, remove dead copper): 124.46,179.07 176.53,179.07 176.53,85.09 99.06,85.09 99.06,119.38 124.46,119.38
RFGND on Bottom Layer (hatched 90Degree grid 0.2 track 0.25, remove dead copper): 67.31,163.83 91.44,163.83 91.44,142.24 101.6,142.24 101.6,123.19 67.31,123.19
SGND on Bottom Layer (hatched 90Degree grid 0.2 track 0.25, remove dead copper): 67.31,179.07 124.46,179.07 124.46,119.38 99.06,119.38 99.06,85.09 67.31,85.09 67.31,123.19 101.6,123.19 101.6,142.24 91.44,142.24 91.44,163.83 67.31,163.83
no net on Internal Plane 1 (split plane): 1385.443,241.994 1385.443,242.247 1511.427,242.247 1511.427,241.994
no net on Internal Plane 1 (split plane): 1385.443,240.724 1385.443,240.977 1511.427,240.977 1511.427,240.724
no net on Internal Plane 1 (split plane): 1385.443,141.664 1385.443,239.707 1511.427,239.707 1511.427,141.664
no net on Internal Plane 1 (split plane): 1385.443,140.394 1385.443,140.647 1511.427,140.647 1511.427,140.394
no net on Internal Plane 1 (split plane): 1385.443,139.124 1385.443,139.377 1511.427,139.377 1511.427,139.124
no net on Internal Plane 2 (split plane): 1385.443,241.994 1385.443,242.247 1511.427,242.247 1511.427,241.994
no net on Internal Plane 2 (split plane): 1385.443,240.724 1385.443,240.977 1511.427,240.977 1511.427,240.724
no net on Internal Plane 2 (split plane): 1385.443,141.664 1385.443,239.707 1511.427,239.707 1511.427,141.664
no net on Internal Plane 2 (split plane): 1385.443,140.394 1385.443,140.647 1511.427,140.647 1511.427,140.394
no net on Internal Plane 2 (split plane): 1385.443,139.124 1385.443,139.377 1511.427,139.377 1511.427,139.124

## Keep-outs
Keep-Out Layer:
  lines w0.305: 67.31,85.09 176.53,85.09 176.53,179.07 67.31,179.07 67.31,85.09

## Other copper
Top Layer:
  text "Ad Hoc Radio Node" at 89.535,88.9 h1.52
  text "Li-Wen Yip (2005)" at 90.17,86.36 h1.52

## Silkscreen, mask and mechanical layers (free items; w line width, h text height)
Bottom Overlay:
  lines w0.305: 67.31,123.19 101.6,123.19 101.6,142.24 91.44,142.24 91.44,163.83 67.31,163.83 ; 99.06,85.09 99.06,119.38 124.46,119.38 124.46,178.435

## Dimensions
67.31,85.09 to 176.53,85.09 on Mechanical 1
67.31,85.09 to 67.31,179.07 on Mechanical 1

## Text inside footprints (layer, text, board x,y; h text height)
JP7: Top Overlay "6" at 165.84,167.215 h1.5 r270; Top Overlay "9" at 165.84,158.905 h1.5 r270; Top Overlay "5" at 156.44,157.52 h1.5 r270; Top Overlay "1" at 156.44,168.35 h1.5 r270
U1: Top Overlay "1" at 118.872,119.888 h1.52
U8: Top Overlay "3" at 113.015,168.14 h1.5 r270; Top Overlay "1" at 113.015,172.97 h1.5 r270; Top Overlay "2" at 113.015,170.68 h1.5 r270
U9: Top Overlay "3" at 137.175,160.52 h1.5 r90; Top Overlay "1" at 137.175,165.35 h1.5 r90; Top Overlay "2" at 137.175,163.06 h1.5 r90